# EAGLE board midicontrol (EAGLE 9.4.0)

Size 160 x 100 mm. Coordinates in mm from the lower left corner, seen from the top.
Outline: 0,0 160,0 160,100 0,100 0,0
Copper layers (1*16): Top 0.035mm / dielectric 1.5mm / Bottom 0.035mm
Design rules "default": minimum track width 6mil, minimum drill 0.35mm, track to track 6mil, track to pad 6mil, pad to pad 6mil, via to via 6mil, smd to smd 6mil, copper to edge 40mil, drill to drill 6mil, minimum pad ring 10mil, minimum via ring 8mil, stop-mask expansion 4mil, vias tented up to drill 0mil, thermal gap 10mil
Net classes: 0 default: clearance 0.152 mm

## Footprints (pad centres in the part's own frame; a part is rotated, then mirrored left to right if it is on the bottom)
JST_B2B-PH_HEADER = drill 0.8 long: P1 1.075,0.048; P2 -0.925,0.048
C1206 = smd 1.6 x 1.8: 1 -1.4,0; 2 1.4,0
DCJACK_2MM_PTH = drill 2.8: GND 0,7.35; GNDBREAK 4.8,10.75 | drill 3.2: PWR 0,13.6
SOD2513X117N = smd 1.085 x 0.55: 1 -1.14,0; 2 1.14,0
SODFL1608X70N = smd 0.53 x 0.4: A 0.8,0; C -0.8,0
NFD-5641 = drill 0.8 square: P$1 -6.35,-7.62 | drill 0.8 long: P$2 -3.81,-7.62; P$3 -1.27,-7.62; P$4 1.27,-7.62; P$5 3.81,-7.62; P$6 6.35,-7.62; P$7 6.35,7.62; P$8 3.81,7.62; P$9 1.27,7.62; P$10 -1.27,7.62; P$11 -3.81,7.62; P$12 -6.35,7.62
B3B-ZR = drill 0.7 pad 1.1: 1 -1.5,0; 2 0,0; 3 1.5,0
SSOP28-LD = smd 0.348 x 1.397: 1 -4.225,-3.656; 2 -3.575,-3.656; 3 -2.925,-3.656; 4 -2.275,-3.656; 5 -1.625,-3.656; 6 -0.975,-3.656; 7 -0.325,-3.656; 8 0.325,-3.656; 9 0.975,-3.656; 10 1.625,-3.656; 11 2.275,-3.656; 12 2.925,-3.656; 13 3.575,-3.656; 14 4.225,-3.656; 15 4.225,3.656; 16 3.575,3.656; 17 2.925,3.656; 18 2.275,3.656; 19 1.625,3.656; 20 0.975,3.656; 21 0.325,3.656; 22 -0.325,3.656; 23 -0.975,3.656; 24 -1.625,3.656; 25 -2.275,3.656; 26 -2.925,3.656; 27 -3.575,3.656; 28 -4.225,3.656
SOT23-5 = smd 0.55 x 1.2: 1 -0.95,-1.3; 2 0,-1.3; 3 0.95,-1.3; 4 0.95,1.3; 5 -0.95,1.3
AVRISP = drill 0.9 pad 1.626: 1 -1.27,2.54; 2 1.27,2.54; 3 -1.27,0; 4 1.27,0; 5 -1.27,-2.54; 6 1.27,-2.54
CUI_UJ2-MIBH2-4-SMT-TR = smd 0.4 x 1.2: 1 -1.3,2.1; 2 -0.65,2.1; 3 0,2.1; 4 0.65,2.1; 5 1.3,2.1 | drill 0.6 pad 1.2 long: SH1 -3.5,0.55; SH4 3.5,0.55 | drill 0.65 pad 1.1 long: SH2 -2.225,2.65; SH3 2.225,2.65 | smd 3 x 0.9: SH5 0,0.55
LED5MMRGB = drill 0.8 pad 1.676: 1 -2.159,0.968; 3 0.889,0.968; 4 2.159,-0.968 | drill 0.8 pad 1.676 octagon: 2 -0.635,-0.968
MAB-5-SH = drill 1.4 pad 2.1: 1 7.5,-2.5; 2 0,-2.5; 3 -7.5,-2.5; 4 5,0; 5 -5,0 | drill 1.35 pad 2: 6 -2.5,-12.5; 7 2.5,-12.5 | drill 2.4 pad 3.6: 8 -7.5,-7.5; 9 7.5,-7.5
PANASONIC_D = smd 3 x 1.4: + 2.4,0; - -2.4,0
SOIC8 = smd 0.5 x 2.2: 1 -1.905,-3.154; 2 -0.645,-3.154; 3 0.625,-3.154; 4 1.895,-3.154; 5 1.905,3.154; 6 0.635,3.154; 7 -0.635,3.154; 8 -1.905,3.154
R0603 = smd 1 x 1.1: 1 -0.85,0; 2 0.85,0
R0603-ROUND = smd 0.898 x 1.1: 1 -0.889,0; 2 0.889,0
ESP201 = drill 0.8 long: P$1 0,0; P$2 2.54,0; P$3 -2.54,0
SJ = smd 1.168 x 1.6: 1 -0.762,0; 2 0.762,0
ALPS_EC12E_SW = drill 1 square: A -2.5,-7.5; B 2.5,-7.5; C 0,-7.5; D -2.5,7; E 2.5,7 | drill 2.2 square: GND1 -6.1,0; GND2 6.1,0
SOP254P1030X460-8N = smd 1.5 x 1.6: 1 -4.85,3.81; 2 -4.85,1.27; 3 -4.85,-1.27; 4 -4.85,-3.81; 5 4.85,-3.81; 6 4.85,-1.27; 7 4.85,1.27; 8 4.85,3.81
SOIC127P600X175-16N = smd 1.702 x 0.533: 1 -2.591,4.445; 2 -2.591,3.175; 3 -2.591,1.905; 4 -2.591,0.635; 5 -2.591,-0.635; 6 -2.591,-1.905; 7 -2.591,-3.175; 8 -2.591,-4.445; 9 2.591,-4.445; 10 2.591,-3.175; 11 2.591,-1.905; 12 2.591,-0.635; 13 2.591,0.635; 14 2.591,1.905; 15 2.591,3.175; 16 2.591,4.445
QFP80P900X900X120-32N = smd 1.5 x 0.55: 1 -4.3,2.8; 2 -4.3,2; 3 -4.3,1.2; 4 -4.3,0.4; 5 -4.3,-0.4; 6 -4.3,-1.2; 7 -4.3,-2; 8 -4.3,-2.8; 17 4.3,-2.8; 18 4.3,-2; 19 4.3,-1.2; 20 4.3,-0.4; 21 4.3,0.4; 22 4.3,1.2; 23 4.3,2; 24 4.3,2.8 | smd 0.55 x 1.5: 9 -2.8,-4.3; 10 -2,-4.3; 11 -1.2,-4.3; 12 -0.4,-4.3; 13 0.4,-4.3; 14 1.2,-4.3; 15 2,-4.3; 16 2.8,-4.3; 25 2.8,4.3; 26 2,4.3; 27 1.2,4.3; 28 0.4,4.3; 29 -0.4,4.3; 30 -1.2,4.3; 31 -2,4.3; 32 -2.8,4.3
RESONATOR = smd 0.7 x 2: 1 -1,0; 2 0,0; 3 1,0

## Placement (x,y rotation side)
BTN0  JST-PH_2-PIN_HEADER  [JST_B2B-PH_HEADER]  156.21,53.34 90 bottom
BTN1  JST-PH_2-PIN_HEADER  [JST_B2B-PH_HEADER]  10.16,22.86 90 top
BTN2  JST-PH_2-PIN_HEADER  [JST_B2B-PH_HEADER]  21.59,22.86 90 top
BTN3  JST-PH_2-PIN_HEADER  [JST_B2B-PH_HEADER]  33.02,22.86 90 top
BTN4  JST-PH_2-PIN_HEADER  [JST_B2B-PH_HEADER]  44.45,22.86 90 top
BTN5  JST-PH_2-PIN_HEADER  [JST_B2B-PH_HEADER]  55.88,22.86 90 top
C1  4.7uf  [C1206]  -50.8,-12.7 0 top  (outside the outline)
C2  4.7uf  [C1206]  -64.77,-30.48 0 top  (outside the outline)
C3  0.1uf  [C1206]  -58.42,-30.48 0 top  (outside the outline)
C4  0.1uf  [C1206]  -64.77,-154.94 0 top  (outside the outline)
C5  4.7uf  [C1206]  -72.39,-167.64 0 top  (outside the outline)
C6  100nf  [C1206]  -85.09,-229.87 0 top  (outside the outline)
C7  100nf  [C1206]  -85.09,-236.22 0 top  (outside the outline)
C8  0.1uf  [C1206]  -85.09,-334.01 0 top  (outside the outline)
C9  100nf  [C1206]  -85.09,-361.95 0 top  (outside the outline)
C10  100nf  [C1206]  -85.09,-368.3 0 top  (outside the outline)
C11  100nf  [C1206]  -85.09,-374.65 0 top  (outside the outline)
C12  100nf  [C1206]  -85.09,-381 0 top  (outside the outline)
C13  100nf  [C1206]  -97.79,-429.26 0 top  (outside the outline)
C14  100nf  [C1206]  -97.79,-435.61 0 top  (outside the outline)
CN1  [DCJACK_2MM_PTH]  5.08,100.33 180 bottom
D1  BAT60JFILM  [SOD2513X117N]  -93.98,-424.18 0 top  (outside the outline)
D2  1N914BWT  [SODFL1608X70N]  -64.77,-127 0 top  (outside the outline)
DIS1  NFD-5641BS  [NFD-5641]  92.71,68.58 0 top
EXP  B3B-ZR  [B3B-ZR]  156.21,64.77 90 top
IC1  FT232RL-TUBE  [SSOP28-LD]  21.59,74.93 0 top
IC4  [SOT23-5]  -52.07,-30.48 0 top  (outside the outline)
ISP  AVRISP-6  [AVRISP]  92.71,6.35 270 top
J1  UJ2-MIBH2-4-SMT-TR  [CUI_UJ2-MIBH2-4-SMT-TR]  19.05,96.52 180 bottom
LED1  RGBLED_CA-5MM  [LED5MMRGB]  66.04,87.63 0 top
MIDI_IN  MABP 5S  [MAB-5-SH]  90.17,85.09 180 bottom
MIDI_OUT  MAB_5_SH  [MAB-5-SH]  39.37,85.09 180 bottom
PC2  47u  [PANASONIC_D]  -83.82,-387.35 0 top  (outside the outline)
PCA9533  PCA9533  [SOIC8]  57.15,90.17 0 top
PWR_IN  JST-PH_2-PIN_HEADER  [JST_B2B-PH_HEADER]  2.54,76.2 90 bottom
R1  10k  [R0603]  -66.04,-71.12 0 top  (outside the outline)
R2  10k  [R0603]  -66.04,-76.2 0 top  (outside the outline)
R3  220R  [R0603]  -66.04,-97.79 0 top  (outside the outline)
R4  220R  [R0603]  -66.04,-102.87 0 top  (outside the outline)
R5  220  [R0603]  -66.04,-132.08 0 top  (outside the outline)
R6  220  [R0603]  -66.04,-143.51 0 top  (outside the outline)
R7  4.7k  [R0603]  -66.04,-148.59 0 top  (outside the outline)
R8  2.2k  [R0603]  -66.04,-161.29 0 top  (outside the outline)
R9  10k  [R0603]  -86.36,-262.89 0 top  (outside the outline)
R10  10k  [R0603]  -86.36,-242.57 0 top  (outside the outline)
R11  10k  [R0603]  -86.36,-247.65 0 top  (outside the outline)
R12  10k  [R0603]  -86.36,-252.73 0 top  (outside the outline)
R13  10k  [R0603]  -86.36,-257.81 0 top  (outside the outline)
R14  10k  [R0603]  15.24,21.59 90 top
R15  10k  [R0603]  26.67,21.59 90 top
R16  10k  [R0603]  38.1,21.59 90 top
R17  10k  [R0603]  49.53,21.59 90 top
R18  10k  [R0603]  60.96,21.59 90 top
R19  1M  [R0603-ROUND]  -86.36,-340.36 0 top  (outside the outline)
R20  27R  [R0603-ROUND]  -86.36,-346.71 0 top  (outside the outline)
R21  1k5  [R0603]  -87.63,-415.29 0 top  (outside the outline)
R22  22r  [R0603]  -99.06,-420.37 0 top  (outside the outline)
R23  1k  [R0603]  -99.06,-441.96 0 top  (outside the outline)
R24  22r  [R0603]  -93.98,-420.37 0 top  (outside the outline)
R25  100r  [R0603]  -92.71,-415.29 0 top  (outside the outline)
R26  220R  [R0603]  -66.04,-54.61 0 top  (outside the outline)
R27  220R  [R0603]  -59.69,-54.61 0 top  (outside the outline)
R28  220R  [R0603]  -66.04,-59.69 0 top  (outside the outline)
R29  1k  [R0603]  -99.06,-447.04 0 top  (outside the outline)
R34  100k  [R0603]  -99.06,-393.7 0 top  (outside the outline)
R35  69k  [R0603]  -99.06,-398.78 0 top  (outside the outline)
S1  ESP201  [ESP201]  71.12,95.25 0 top
SJ2  [SJ]  -87.63,-421.64 0 top  (outside the outline)
SW1  EC12E_SW  [ALPS_EC12E_SW]  132.08,69.85 0 top
U1  6N138S(TB)  [SOP254P1030X460-8N]  35.56,73.66 180 top
U3  74HC595D  [SOIC127P600X175-16N]  58.42,40.64 0 top
U4  ATMEGA328P-AN  [QFP80P900X900X120-32N]  48.26,67.31 0 top
Y2  16MHz  [RESONATOR]  -81.28,-345.44 0 top  (outside the outline)

## Library data of the parts
BTN0 BTN1-BTN5 PWR_IN = srg
C1-C14 = rcl; SPICEPREFIX: C
CN1 ISP LED1 = adafruit
D1 = BAT60JFILM; ALLIED_NUMBER: 70389806; ALLIED_PRICE-STOCK: http://www.alliedelec.com/stmicroelectronics-bat60jfilm/70389806/; DESCRIPTION: BAT60JFILM, Schottky Diode, 3A max, 10V, 2-Pin, SOD-323; HEIGHT: 1.17mm; MANUFACTURER_NAME: STMicroelectronics; MANUFACTURER_PART_NUMBER: BAT60JFILM; MOUSER_PART_NUMBER: 511-BAT60JFILM; MOUSER_PRICE-STOCK: https://www.mouser.com/Search/Refine.aspx?Keyword=511-BAT60JFILM; RS_PART_NUMBER: 1458781; RS_PRICE-STOCK: http://uk.rs-online.com/web/p/products/1458781
D2 = 1N914BWT; AVAILABILITY: Unavailable; DESCRIPTION: 1N914B Series 75 V 300 mA Surface Mount Small Signal Diode - SOD-523F; MF: ON Semiconductor; MP: 1N914BWT; PACKAGE: SOD-523F ON Semiconductor; PRICE: None
DIS1 = display-misc
EXP = jst
IC1 = FT232RL-TUBE; AVAILABILITY: Unavailable; DESCRIPTION: USB-to-UART 1-CH 256byte FIFO 5V 28-Pin SSOP Tube; MF: FTDI,; MP: FT232RL-TUBE; PACKAGE: SSOP-28 FTDI; PRICE: None
IC4 = v-reg-micrel; OC_FARNELL: unknown; OC_NEWARK: unknown
J1 = UJ2-MIBH2-4-SMT-TR; AVAILABILITY: Unavailable; CUI_PURCHASE_URL: https://www.cui.com/product/interconnect/usb-connectors/micro-b/uj2-mibh2-4-smt?utm_source=snapeda.com&utm_medium=referral&utm_campaign=snapedaBOM; DESCRIPTION: Micro B Type 5 Pin Horizontal 30 µin Plating SMT USB Jack 2.0; MF: CUI Inc.; MP: UJ2-MIBH2-4-SMT-TR; PACKAGE: None; PRICE: None
MIDI_IN MIDI_OUT = MAB_5_SH; DESCRIPTION: HIRSCHMANN - MAB 5 SH - SOCKET, DIN, PCB, 5PIN; HEIGHT: mm; MANUFACTURER_NAME: Hirschmann; MANUFACTURER_PART_NUMBER: MAB 5 SH
PC2 = rcl
PCA9533 = adam - ics
R1-R18 R21-R29 R34 R35 = rcl; SPICEPREFIX: R
R19 R20 Y2 = SmartPrj
S1 = olli
SJ2 = jumper
SW1 = switch-alps; MPN: EC12E2424407; OC_FARNELL: 1520813; OC_NEWARK: 74M1068
U1 = 6N138S(TB); DESCRIPTION: High Speed Optocouplers Low Input, High Gain DC Input; HEIGHT: 4.6mm; MANUFACTURER_NAME: Everlight; MANUFACTURER_PART_NUMBER: 6N138S(TB); MOUSER_PART_NUMBER: 638-6N138STB; MOUSER_PRICE-STOCK: https://www.mouser.com/Search/Refine.aspx?Keyword=638-6N138STB
U3 = 74HC595D; AVAILABILITY: Unavailable; DESCRIPTION: Shift Register Single 8-Bit Serial to Serial/Parallel 16-Pin SO; MF: Toshiba Semiconductor; MP: 74HC595D; PACKAGE: SO-16 NXP Semiconductors; PRICE: None
U4 = ATMEGA328P-AN; AVAILABILITY: Unavailable; DESCRIPTION: MCU 8-bit ATmega AVR RISC 32KB Flash 2.5V/3.3V/5V 32-Pin TQFP Tray; MF: Microchip; MP: ATMEGA328P-AN; PACKAGE: TQFP-32 Microchip; PRICE: None

## Nets
3V3OUT: IC1.17
+5V: BTN0.P2 BTN1.P2 BTN2.P2 BTN3.P2 BTN4.P2 BTN5.P2 C1.2 C4.1 C5.2 C8.1 C11.2 C12.2 C13.1 C14.1 D1.1 EXP.1 IC1.4 IC1.20 IC4.5 ISP.2 LED1.2 PC2.+ PCA9533.8 R1.1 R2.1 R3.1 R5.1 R8.1 R21.2 SW1.D U1.8 U3.10 U3.16 U4.4 U4.6 U4.18
B0: BTN0.P1 R9.2 U4.9
B1: BTN1.P1 R14.2 U4.10
B2: BTN2.P1 R15.2 U4.11
B3: BTN3.P1 R16.2 U4.25
B4: BTN4.P1 R17.2 U4.26
B5: BTN5.P1 R18.2
BAT_LVL: R34.1 R35.2 U4.22
D1: DIS1.P$6 U4.12
D2: DIS1.P$8 U4.13
D3: DIS1.P$9 U4.23
D4: DIS1.P$12 U4.24
ENC_A: C7.1 R10.1 R11.2 SW1.B U4.1
ENC_B: C6.2 R10.2 R11.1 SW1.A U4.32
ENC_SW: R12.1 SW1.E U4.2
EXP_IN: EXP.2 U4.19
GND: C1.1 C2.1 C3.1 C4.2 C5.1 C6.1 C7.2 C8.2 C10.2 C11.1 C12.1 C13.2 C14.2 CN1.GND CN1.GNDBREAK EXP.3 IC1.7 IC1.18 IC1.21 IC1.25 IC1.26 IC4.2 ISP.6 J1.5 MIDI_OUT.2 PC2.- PCA9533.4 PWR_IN.P1 R7.1 R9.1 R12.2 R13.2 R14.1 R15.1 R16.1 R17.1 R18.1 R35.1 SJ2.1 SW1.C U1.5 U3.8 U3.13 U4.3 U4.5 U4.21 Y2.2
MIDI_IN: R5.2 R8.2 R23.1 U1.6 U4.30
MIDI_OUT: R4.1 R29.1 U4.31
MISO: ISP.1 U4.16
MOSI: ISP.4 U3.14 U4.15
N$1: DIS1.P$11 U3.15
N$2: DIS1.P$7 U3.1
N$3: DIS1.P$4 U3.2
N$4: DIS1.P$2 U3.3
N$5: DIS1.P$1 U3.4
N$6: DIS1.P$10 U3.5
N$7: DIS1.P$5 U3.6
N$8: DIS1.P$3 U3.7
N$9: MIDI_OUT.4 R3.2
N$10: MIDI_OUT.5 R4.2
N$11: D2.A MIDI_IN.5 U1.3
N$12: D2.C R6.1 U1.2
N$13: MIDI_IN.4 R6.2
N$14: R7.2 U1.7
N$15: LED1.1 R26.2
N$16: R20.1 U4.7
N$17: LED1.3 R27.2
N$18: LED1.4 R28.2
N$19: IC1.1 R23.2
N$20: C2.2 IC4.4
N$21: C10.1 U4.20
N$22: PCA9533.1 R26.1
N$23: PCA9533.2 R27.1
N$24: PCA9533.3 R28.1
N$25: IC1.5 R29.2
N$26: C3.2 IC4.1 S1.P$1
N$28: J1.3 R21.1 R24.2
N$29: C9.2 IC1.2
N$30: D1.2 J1.1
N$32: R25.1 SJ2.2
N$34: J1.2 R22.2
N$38: IC1.16 R22.1
N$39: IC1.15 R24.1
N$40: J1.SH1 J1.SH2 J1.SH3 J1.SH4 J1.SH5 R25.2
PWR: CN1.PWR PWR_IN.P2 R34.2 S1.P$3
RCK: R13.1 U3.12 U4.14
RST: C9.1 ISP.5 U4.29
SCK: ISP.3 U3.11 U4.17
SCL: PCA9533.6 R1.2 U4.28
SDA: PCA9533.7 R2.2 U4.27
XT1: R19.1 R20.2 Y2.3
XTAL2: R19.2 U4.8 Y2.1

## Tracks (layer width: path | path; a pad name or v marks a point on that pad's centre or on a via)
+5V  (35 unrouted)
B0  (2 unrouted)
B1  (2 unrouted)
B2  (2 unrouted)
B3  (2 unrouted)
B4  (2 unrouted)
B5  (1 unrouted)
BAT_LVL  (2 unrouted)
D1  (1 unrouted)
D2  (1 unrouted)
D3  (1 unrouted)
D4  (1 unrouted)
ENC_A  (4 unrouted)
ENC_B  (4 unrouted)
ENC_SW  (2 unrouted)
EXP_IN  (1 unrouted)
GND  (46 unrouted)
MIDI_IN  (4 unrouted)
MIDI_OUT  (2 unrouted)
MISO  (1 unrouted)
MOSI  (2 unrouted)
N$1  (1 unrouted)
N$2  (1 unrouted)
N$3  (1 unrouted)
N$4  (1 unrouted)
N$5  (1 unrouted)
N$6  (1 unrouted)
N$7  (1 unrouted)
N$8  (1 unrouted)
N$9  (1 unrouted)
N$10  (1 unrouted)
N$11  (2 unrouted)
N$12  (2 unrouted)
N$13  (1 unrouted)
N$14  (1 unrouted)
N$15  (1 unrouted)
N$16  (1 unrouted)
N$17  (1 unrouted)
N$18  (1 unrouted)
N$19  (1 unrouted)
N$20  (1 unrouted)
N$21  (1 unrouted)
N$22  (1 unrouted)
N$23  (1 unrouted)
N$24  (1 unrouted)
N$25  (1 unrouted)
N$26  (2 unrouted)
N$28  (2 unrouted)
N$29  (1 unrouted)
N$30  (1 unrouted)
N$32  (1 unrouted)
N$34  (1 unrouted)
N$38  (1 unrouted)
N$39  (1 unrouted)
N$40  (5 unrouted)
PWR  (3 unrouted)
RCK  (2 unrouted)
RST  (2 unrouted)
SCK  (2 unrouted)
SCL  (2 unrouted)
SDA  (2 unrouted)
XT1  (2 unrouted)
XTAL2  (2 unrouted)